# Altium PCB QV-601-Contril.PcbDoc (part 2 of 2)
Units mm, origin at the board's own origin, x right, y up, seen from the top; angles counter-clockwise.
Board outline 150.03 x 60.03 mm, 2 copper layers (TOP, BOTTOM), stack 0.264 mm thick; 44 components, 19 nets, 132 pads, 668 vias.
Unrouted connection lines stored in the file: 3.
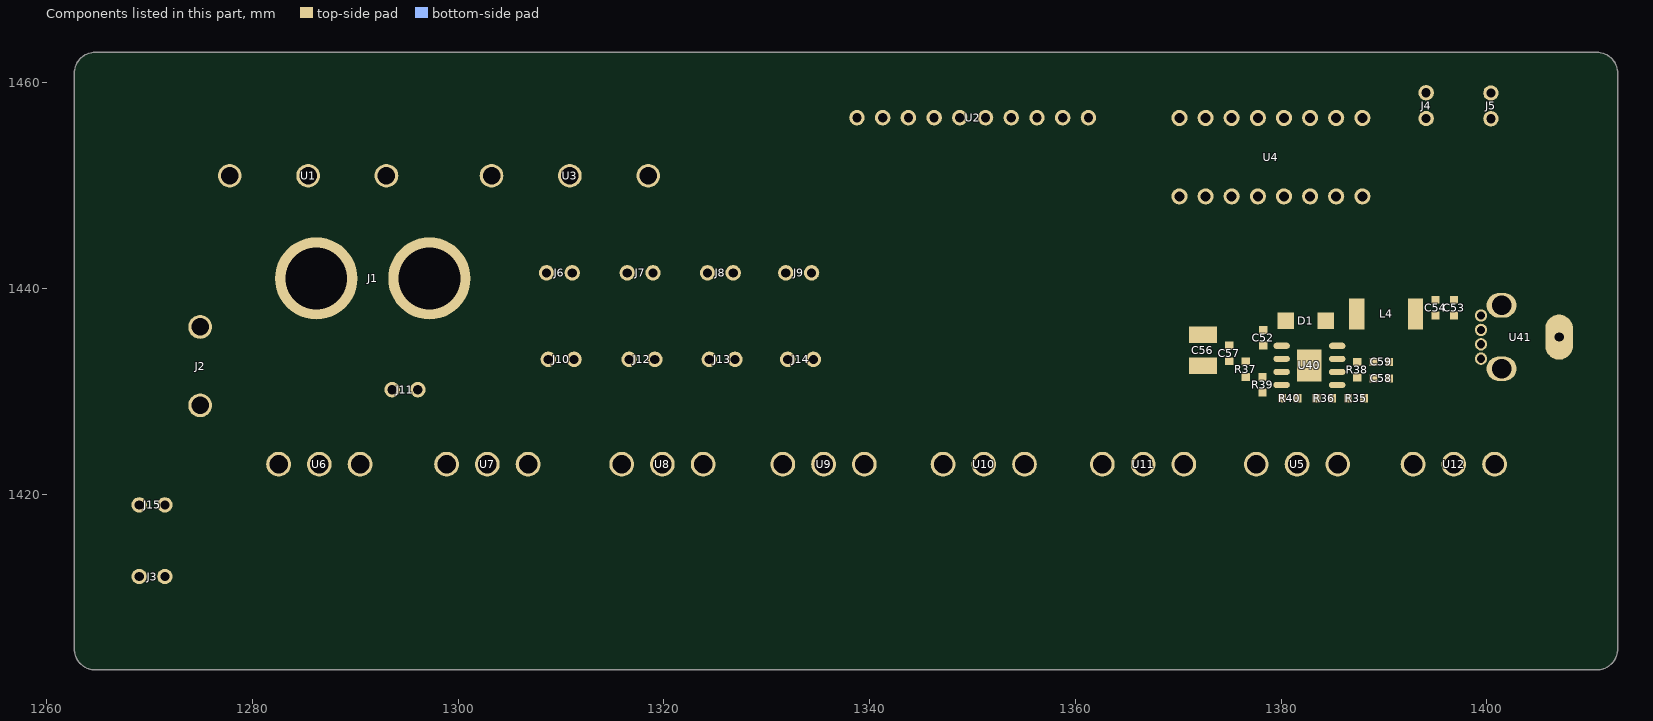
[diagram p2: the components of this part, seen from the top]

## Other copper (continued)
BOTTOM:
  pour cut-out: 1294.542,1430.17 1294.509,1430.419 1294.413,1430.651 1294.26,1430.85 1294.061,1431.003 1293.829,1431.099 1293.58,1431.132 1293.331,1431.099 1293.099,1431.003 1292.9,1430.85 1292.747,1430.651 1292.651,1430.419 1292.619,1430.17 1292.651,1429.921 1292.747,1429.689 1292.9,1429.49 1293.099,1429.337 1293.331,1429.241 1293.58,1429.209 1293.829,1429.241 1294.061,1429.337 1294.26,1429.49 1294.413,1429.689 1294.509,1429.921 1294.542,1430.17
  pour cut-out: 1335.889,1433.117 1335.842,1433.467 1335.707,1433.793 1335.492,1434.073 1335.212,1434.288 1334.886,1434.423 1334.536,1434.469 1334.186,1434.423 1333.859,1434.288 1333.579,1434.073 1333.364,1433.793 1333.229,1433.467 1333.183,1433.117 1333.229,1432.766 1333.364,1432.44 1333.579,1432.16 1333.859,1431.945 1334.186,1431.81 1334.536,1431.764 1334.886,1431.81 1335.212,1431.945 1335.492,1432.16 1335.707,1432.44 1335.842,1432.766 1335.889,1433.117
  pour cut-out: 1320.436,1433.117 1320.391,1433.458 1320.259,1433.775 1320.05,1434.048 1319.777,1434.258 1319.459,1434.389 1319.118,1434.434 1318.777,1434.389 1318.459,1434.258 1318.186,1434.048 1317.977,1433.775 1317.845,1433.458 1317.8,1433.117 1317.845,1432.776 1317.977,1432.458 1318.186,1432.185 1318.459,1431.976 1318.777,1431.844 1319.118,1431.799 1319.459,1431.844 1319.777,1431.976 1320.05,1432.185 1320.259,1432.458 1320.391,1432.776 1320.436,1433.117
  pour cut-out: 1328.217,1433.117 1328.172,1433.453 1328.042,1433.767 1327.836,1434.036 1327.566,1434.243 1327.252,1434.373 1326.916,1434.417 1326.579,1434.373 1326.265,1434.243 1325.996,1434.036 1325.789,1433.767 1325.659,1433.453 1325.615,1433.117 1325.659,1432.78 1325.789,1432.466 1325.996,1432.197 1326.265,1431.99 1326.579,1431.86 1326.916,1431.816 1327.252,1431.86 1327.566,1431.99 1327.836,1432.197 1328.042,1432.466 1328.172,1432.78 1328.217,1433.117
  pour cut-out: 1312.556,1433.117 1312.512,1433.45 1312.384,1433.76 1312.179,1434.026 1311.913,1434.231 1311.602,1434.359 1311.269,1434.403 1310.936,1434.359 1310.626,1434.231 1310.36,1434.026 1310.155,1433.76 1310.027,1433.45 1309.983,1433.117 1310.027,1432.784 1310.155,1432.473 1310.36,1432.207 1310.626,1432.002 1310.936,1431.874 1311.269,1431.83 1311.602,1431.874 1311.913,1432.002 1312.179,1432.207 1312.384,1432.473 1312.512,1432.784 1312.556,1433.117
  pour cut-out: 1291.229,1440.986 1291.186,1441.641 1291.058,1442.286 1290.847,1442.908 1290.556,1443.497 1290.191,1444.043 1289.758,1444.537 1289.264,1444.97 1288.718,1445.335 1288.129,1445.625 1287.507,1445.836 1286.863,1445.964 1286.207,1446.007 1285.552,1445.964 1284.908,1445.836 1284.286,1445.625 1283.697,1445.335 1283.151,1444.97 1282.657,1444.537 1282.224,1444.043 1281.859,1443.497 1281.568,1442.908 1281.357,1442.286 1281.229,1441.641 1281.186,1440.986 1281.229,1440.33 1281.357,1439.686 1281.568,1439.064 1281.859,1438.475 1282.224,1437.929 1282.657,1437.435 1283.151,1437.002 1283.697,1436.637 1284.286,1436.347 1284.908,1436.136 1285.552,1436.007 1286.207,1435.964 1286.863,1436.007 1287.507,1436.136 1288.129,1436.347 1288.718,1436.637 1289.264,1437.002 1289.758,1437.435 1290.191,1437.929 1290.556,1438.475 1290.847,1439.064 1291.058,1439.686 1291.186,1440.33 1291.229,1440.986
  pour cut-out: 1279.802,1450.973 1279.763,1451.365 1279.649,1451.742 1279.463,1452.089 1279.213,1452.394 1278.909,1452.644 1278.561,1452.83 1278.184,1452.944 1277.792,1452.982 1277.4,1452.944 1277.023,1452.83 1276.676,1452.644 1276.371,1452.394 1276.121,1452.089 1275.935,1451.742 1275.821,1451.365 1275.783,1450.973 1275.821,1450.581 1275.935,1450.204 1276.121,1449.856 1276.371,1449.552 1276.676,1449.302 1277.023,1449.116 1277.4,1449.002 1277.792,1448.963 1278.184,1449.002 1278.561,1449.116 1278.909,1449.302 1279.213,1449.552 1279.463,1449.856 1279.649,1450.204 1279.763,1450.581 1279.802,1450.973
  pour cut-out: 1287.422,1450.973 1287.383,1451.365 1287.269,1451.742 1287.083,1452.089 1286.833,1452.394 1286.529,1452.644 1286.181,1452.83 1285.804,1452.944 1285.412,1452.982 1285.02,1452.944 1284.643,1452.83 1284.296,1452.644 1283.991,1452.394 1283.741,1452.089 1283.555,1451.742 1283.441,1451.365 1283.403,1450.973 1283.441,1450.581 1283.555,1450.204 1283.741,1449.856 1283.991,1449.552 1284.296,1449.302 1284.643,1449.116 1285.02,1449.002 1285.412,1448.963 1285.804,1449.002 1286.181,1449.116 1286.529,1449.302 1286.833,1449.552 1287.083,1449.856 1287.269,1450.204 1287.383,1450.581 1287.422,1450.973
  pour cut-out: 1295.042,1450.973 1295.003,1451.365 1294.889,1451.742 1294.703,1452.089 1294.453,1452.394 1294.149,1452.644 1293.801,1452.83 1293.424,1452.944 1293.032,1452.982 1292.64,1452.944 1292.263,1452.83 1291.916,1452.644 1291.611,1452.394 1291.361,1452.089 1291.175,1451.742 1291.061,1451.365 1291.023,1450.973 1291.061,1450.581 1291.175,1450.204 1291.361,1449.856 1291.611,1449.552 1291.916,1449.302 1292.263,1449.116 1292.64,1449.002 1293.032,1448.963 1293.424,1449.002 1293.801,1449.116 1294.149,1449.302 1294.453,1449.552 1294.703,1449.856 1294.889,1450.204 1295.003,1450.581 1295.042,1450.973
  pour cut-out: 0,0 0.254,0 0.254,0.254 0,0.254
  pour cut-out: 0,0 0.254,0 0.254,0.254 0,0.254
  pour cut-out: 0,0 0.254,0 0.254,0.254 0,0.254
  pour cut-out: 0,0 0.254,0 0.254,0.254 0,0.254
  pour cut-out: 0,0 0.254,0 0.254,0.254 0,0.254
  pour cut-out: 0,0 0.254,0 0.254,0.254 0,0.254
  pour cut-out: 0,0 0.254,0 0.254,0.254 0,0.254
  pour cut-out: 0,0 0.254,0 0.254,0.254 0,0.254
  pour cut-out: 0,0 0.254,0 0.254,0.254 0,0.254
  pour cut-out: 0,0 0.254,0 0.254,0.254 0,0.254
  pour cut-out: 0,0 0.254,0 0.254,0.254 0,0.254
  pour cut-out: 0,0 0.254,0 0.254,0.254 0,0.254
  pour cut-out: 0,0 0.254,0 0.254,0.254 0,0.254
  pour cut-out: 0,0 0.254,0 0.254,0.254 0,0.254
  pour cut-out: 0,0 0.254,0 0.254,0.254 0,0.254
  pour cut-out: 0,0 0.254,0 0.254,0.254 0,0.254
  pour cut-out: 0,0 0.254,0 0.254,0.254 0,0.254
  pour cut-out: 0,0 0.254,0 0.254,0.254 0,0.254
  pour cut-out: 0,0 0.254,0 0.254,0.254 0,0.254
  pour cut-out: 0,0 0.254,0 0.254,0.254 0,0.254
  pour cut-out: 1295.042,1450.973 1295.003,1451.365 1294.889,1451.742 1294.703,1452.089 1294.453,1452.394 1294.149,1452.644 1293.801,1452.83 1293.424,1452.944 1293.032,1452.982 1292.64,1452.944 1292.263,1452.83 1291.916,1452.644 1291.611,1452.394 1291.361,1452.089 1291.175,1451.742 1291.061,1451.365 1291.023,1450.973 1291.061,1450.581 1291.175,1450.204 1291.361,1449.856 1291.611,1449.552 1291.916,1449.302 1292.263,1449.116 1292.64,1449.002 1293.032,1448.963 1293.424,1449.002 1293.801,1449.116 1294.149,1449.302 1294.453,1449.552 1294.703,1449.856 1294.889,1450.204 1295.003,1450.581 1295.042,1450.973
  pour cut-out: 1287.422,1450.973 1287.383,1451.365 1287.269,1451.742 1287.083,1452.089 1286.833,1452.394 1286.529,1452.644 1286.181,1452.83 1285.804,1452.944 1285.412,1452.982 1285.02,1452.944 1284.643,1452.83 1284.296,1452.644 1283.991,1452.394 1283.741,1452.089 1283.555,1451.742 1283.441,1451.365 1283.403,1450.973 1283.441,1450.581 1283.555,1450.204 1283.741,1449.856 1283.991,1449.552 1284.296,1449.302 1284.643,1449.116 1285.02,1449.002 1285.412,1448.963 1285.804,1449.002 1286.181,1449.116 1286.529,1449.302 1286.833,1449.552 1287.083,1449.856 1287.269,1450.204 1287.383,1450.581 1287.422,1450.973
  pour cut-out: 1279.802,1450.973 1279.763,1451.365 1279.649,1451.742 1279.463,1452.089 1279.213,1452.394 1278.909,1452.644 1278.561,1452.83 1278.184,1452.944 1277.792,1452.982 1277.4,1452.944 1277.023,1452.83 1276.676,1452.644 1276.371,1452.394 1276.121,1452.089 1275.935,1451.742 1275.821,1451.365 1275.783,1450.973 1275.821,1450.581 1275.935,1450.204 1276.121,1449.856 1276.371,1449.552 1276.676,1449.302 1277.023,1449.116 1277.4,1449.002 1277.792,1448.963 1278.184,1449.002 1278.561,1449.116 1278.909,1449.302 1279.213,1449.552 1279.463,1449.856 1279.649,1450.204 1279.763,1450.581 1279.802,1450.973
  pour cut-out: 1291.229,1440.986 1291.186,1441.641 1291.058,1442.286 1290.847,1442.908 1290.556,1443.497 1290.191,1444.043 1289.758,1444.537 1289.264,1444.97 1288.718,1445.335 1288.129,1445.625 1287.507,1445.836 1286.863,1445.964 1286.207,1446.007 1285.552,1445.964 1284.908,1445.836 1284.286,1445.625 1283.697,1445.335 1283.151,1444.97 1282.657,1444.537 1282.224,1444.043 1281.859,1443.497 1281.568,1442.908 1281.357,1442.286 1281.229,1441.641 1281.186,1440.986 1281.229,1440.33 1281.357,1439.686 1281.568,1439.064 1281.859,1438.475 1282.224,1437.929 1282.657,1437.435 1283.151,1437.002 1283.697,1436.637 1284.286,1436.347 1284.908,1436.136 1285.552,1436.007 1286.207,1435.964 1286.863,1436.007 1287.507,1436.136 1288.129,1436.347 1288.718,1436.637 1289.264,1437.002 1289.758,1437.435 1290.191,1437.929 1290.556,1438.475 1290.847,1439.064 1291.058,1439.686 1291.186,1440.33 1291.229,1440.986
  pour cut-out: 0,0 0.254,0 0.254,0.254 0,0.254
  pour cut-out: 0,0 0.254,0 0.254,0.254 0,0.254
  pour cut-out: 0,0 0.254,0 0.254,0.254 0,0.254
  pour cut-out: 0,0 0.254,0 0.254,0.254 0,0.254
  pour cut-out: 1312.556,1433.117 1312.512,1433.45 1312.384,1433.76 1312.179,1434.026 1311.913,1434.231 1311.602,1434.359 1311.269,1434.403 1310.936,1434.359 1310.626,1434.231 1310.36,1434.026 1310.155,1433.76 1310.027,1433.45 1309.983,1433.117 1310.027,1432.784 1310.155,1432.473 1310.36,1432.207 1310.626,1432.002 1310.936,1431.874 1311.269,1431.83 1311.602,1431.874 1311.913,1432.002 1312.179,1432.207 1312.384,1432.473 1312.512,1432.784 1312.556,1433.117
  pour cut-out: 1328.217,1433.117 1328.172,1433.453 1328.042,1433.767 1327.836,1434.036 1327.566,1434.243 1327.252,1434.373 1326.916,1434.417 1326.579,1434.373 1326.265,1434.243 1325.996,1434.036 1325.789,1433.767 1325.659,1433.453 1325.615,1433.117 1325.659,1432.78 1325.789,1432.466 1325.996,1432.197 1326.265,1431.99 1326.579,1431.86 1326.916,1431.816 1327.252,1431.86 1327.566,1431.99 1327.836,1432.197 1328.042,1432.466 1328.172,1432.78 1328.217,1433.117
  pour cut-out: 1320.436,1433.117 1320.391,1433.458 1320.259,1433.775 1320.05,1434.048 1319.777,1434.258 1319.459,1434.389 1319.118,1434.434 1318.777,1434.389 1318.459,1434.258 1318.186,1434.048 1317.977,1433.775 1317.845,1433.458 1317.8,1433.117 1317.845,1432.776 1317.977,1432.458 1318.186,1432.185 1318.459,1431.976 1318.777,1431.844 1319.118,1431.799 1319.459,1431.844 1319.777,1431.976 1320.05,1432.185 1320.259,1432.458 1320.391,1432.776 1320.436,1433.117
  pour cut-out: 1335.889,1433.117 1335.842,1433.467 1335.707,1433.793 1335.492,1434.073 1335.212,1434.288 1334.886,1434.423 1334.536,1434.469 1334.186,1434.423 1333.859,1434.288 1333.579,1434.073 1333.364,1433.793 1333.229,1433.467 1333.183,1433.117 1333.229,1432.766 1333.364,1432.44 1333.579,1432.16 1333.859,1431.945 1334.186,1431.81 1334.536,1431.764 1334.886,1431.81 1335.212,1431.945 1335.492,1432.16 1335.707,1432.44 1335.842,1432.766 1335.889,1433.117
  pour cut-out: 0,0 0.254,0 0.254,0.254 0,0.254
  pour cut-out: 0,0 0.254,0 0.254,0.254 0,0.254
  pour cut-out: 0,0 0.254,0 0.254,0.254 0,0.254
  pour cut-out: 0,0 0.254,0 0.254,0.254 0,0.254
  pour cut-out: 0,0 0.254,0 0.254,0.254 0,0.254
  pour cut-out: 0,0 0.254,0 0.254,0.254 0,0.254
  pour cut-out: 0,0 0.254,0 0.254,0.254 0,0.254
  pour cut-out: 0,0 0.254,0 0.254,0.254 0,0.254
  pour cut-out: 0,0 0.254,0 0.254,0.254 0,0.254
  pour cut-out: 0,0 0.254,0 0.254,0.254 0,0.254
  pour cut-out: 0,0 0.254,0 0.254,0.254 0,0.254
  pour cut-out: 0,0 0.254,0 0.254,0.254 0,0.254
  pour cut-out: 0,0 0.254,0 0.254,0.254 0,0.254
  pour cut-out: 0,0 0.254,0 0.254,0.254 0,0.254
  pour cut-out: 0,0 0.254,0 0.254,0.254 0,0.254
  pour cut-out: 0,0 0.254,0 0.254,0.254 0,0.254
  pour cut-out: 0,0 0.254,0 0.254,0.254 0,0.254
  pour cut-out: 0,0 0.254,0 0.254,0.254 0,0.254
  pour cut-out: 0,0 0.254,0 0.254,0.254 0,0.254
  pour cut-out: 0,0 0.254,0 0.254,0.254 0,0.254
  pour cut-out: 0,0 0.254,0 0.254,0.254 0,0.254
  pour cut-out: 0,0 0.254,0 0.254,0.254 0,0.254
  pour cut-out: 0,0 0.254,0 0.254,0.254 0,0.254
  pour cut-out: 0,0 0.254,0 0.254,0.254 0,0.254
  pour cut-out: 0,0 0.254,0 0.254,0.254 0,0.254
  pour cut-out: 0,0 0.254,0 0.254,0.254 0,0.254
  pour cut-out: 0,0 0.254,0 0.254,0.254 0,0.254
  pour cut-out: 0,0 0.254,0 0.254,0.254 0,0.254
  pour cut-out: 0,0 0.254,0 0.254,0.254 0,0.254
  pour cut-out: 0,0 0.254,0 0.254,0.254 0,0.254
  pour cut-out: 0,0 0.254,0 0.254,0.254 0,0.254
  pour cut-out: 0,0 0.254,0 0.254,0.254 0,0.254
  pour cut-out: 0,0 0.254,0 0.254,0.254 0,0.254
  pour cut-out: 0,0 0.254,0 0.254,0.254 0,0.254
  pour cut-out: 0,0 0.254,0 0.254,0.254 0,0.254
  pour cut-out: 0,0 0.254,0 0.254,0.254 0,0.254
  pour cut-out: 0,0 0.254,0 0.254,0.254 0,0.254
  pour cut-out: 0,0 0.254,0 0.254,0.254 0,0.254
  pour cut-out: 0,0 0.254,0 0.254,0.254 0,0.254
  pour cut-out: 0,0 0.254,0 0.254,0.254 0,0.254
  pour cut-out: 0,0 0.254,0 0.254,0.254 0,0.254
  pour cut-out: 0,0 0.254,0 0.254,0.254 0,0.254
  pour cut-out: 0,0 0.254,0 0.254,0.254 0,0.254
  pour cut-out: 0,0 0.254,0 0.254,0.254 0,0.254
  pour cut-out: 0,0 0.254,0 0.254,0.254 0,0.254
  pour cut-out: 0,0 0.254,0 0.254,0.254 0,0.254
  pour cut-out: 0,0 0.254,0 0.254,0.254 0,0.254
  pour cut-out: 0,0 0.254,0 0.254,0.254 0,0.254
  pour cut-out: 0,0 0.254,0 0.254,0.254 0,0.254
  pour cut-out: 0,0 0.254,0 0.254,0.254 0,0.254
  pour cut-out: 0,0 0.254,0 0.254,0.254 0,0.254
  pour cut-out: 0,0 0.254,0 0.254,0.254 0,0.254
  pour cut-out: 0,0 0.254,0 0.254,0.254 0,0.254
  pour cut-out: 0,0 0.254,0 0.254,0.254 0,0.254
  pour cut-out: 0,0 0.254,0 0.254,0.254 0,0.254
  pour cut-out: 0,0 0.254,0 0.254,0.254 0,0.254
  pour cut-out: 0,0 0.254,0 0.254,0.254 0,0.254
  pour cut-out: 0,0 0.254,0 0.254,0.254 0,0.254
  pour cut-out: 0,0 0.254,0 0.254,0.254 0,0.254
  pour cut-out: 0,0 0.254,0 0.254,0.254 0,0.254
  pour cut-out: 0,0 0.254,0 0.254,0.254 0,0.254
  pour cut-out: 0,0 0.254,0 0.254,0.254 0,0.254
  pour cut-out: 0,0 0.254,0 0.254,0.254 0,0.254
  pour cut-out: 0,0 0.254,0 0.254,0.254 0,0.254
  pour cut-out: 0,0 0.254,0 0.254,0.254 0,0.254
  pour cut-out: 0,0 0.254,0 0.254,0.254 0,0.254
  pour cut-out: 0,0 0.254,0 0.254,0.254 0,0.254
  pour cut-out: 0,0 0.254,0 0.254,0.254 0,0.254
  pour cut-out: 0,0 0.254,0 0.254,0.254 0,0.254
  pour cut-out: 0,0 0.254,0 0.254,0.254 0,0.254
  pour cut-out: 0,0 0.254,0 0.254,0.254 0,0.254
  pour cut-out: 0,0 0.254,0 0.254,0.254 0,0.254
  pour cut-out: 0,0 0.254,0 0.254,0.254 0,0.254
  pour cut-out: 0,0 0.254,0 0.254,0.254 0,0.254
  pour cut-out: 0,0 0.254,0 0.254,0.254 0,0.254
  pour cut-out: 0,0 0.254,0 0.254,0.254 0,0.254
  pour cut-out: 0,0 0.254,0 0.254,0.254 0,0.254
  pour cut-out: 0,0 0.254,0 0.254,0.254 0,0.254
  pour cut-out: 0,0 0.254,0 0.254,0.254 0,0.254
  pour cut-out: 0,0 0.254,0 0.254,0.254 0,0.254
  pour cut-out: 0,0 0.254,0 0.254,0.254 0,0.254
  pour cut-out: 0,0 0.254,0 0.254,0.254 0,0.254
  pour cut-out: 0,0 0.254,0 0.254,0.254 0,0.254
  pour cut-out: 0,0 0.254,0 0.254,0.254 0,0.254
  pour cut-out: 0,0 0.254,0 0.254,0.254 0,0.254
  pour cut-out: 0,0 0.254,0 0.254,0.254 0,0.254
  pour cut-out: 0,0 0.254,0 0.254,0.254 0,0.254
  pour cut-out: 0,0 0.254,0 0.254,0.254 0,0.254
  pour cut-out: 0,0 0.254,0 0.254,0.254 0,0.254
  pour cut-out: 0,0 0.254,0 0.254,0.254 0,0.254
  pour cut-out: 0,0 0.254,0 0.254,0.254 0,0.254
  pour cut-out: 0,0 0.254,0 0.254,0.254 0,0.254
  pour cut-out: 0,0 0.254,0 0.254,0.254 0,0.254
  pour cut-out: 0,0 0.254,0 0.254,0.254 0,0.254
  pour cut-out: 0,0 0.254,0 0.254,0.254 0,0.254
  pour cut-out: 0,0 0.254,0 0.254,0.254 0,0.254
  pour cut-out: 0,0 0.254,0 0.254,0.254 0,0.254
  pour cut-out: 0,0 0.254,0 0.254,0.254 0,0.254
  pour cut-out: 0,0 0.254,0 0.254,0.254 0,0.254
  pour cut-out: 0,0 0.254,0 0.254,0.254 0,0.254
  pour cut-out: 0,0 0.254,0 0.254,0.254 0,0.254
  pour cut-out: 0,0 0.254,0 0.254,0.254 0,0.254
  pour cut-out: 0,0 0.254,0 0.254,0.254 0,0.254
  pour cut-out: 0,0 0.254,0 0.254,0.254 0,0.254
  pour cut-out: 0,0 0.254,0 0.254,0.254 0,0.254
  pour cut-out: 0,0 0.254,0 0.254,0.254 0,0.254
  pour cut-out: 0,0 0.254,0 0.254,0.254 0,0.254
  pour cut-out: 0,0 0.254,0 0.254,0.254 0,0.254
  pour cut-out: 0,0 0.254,0 0.254,0.254 0,0.254
  pour cut-out: 0,0 0.254,0 0.254,0.254 0,0.254
  pour cut-out: 0,0 0.254,0 0.254,0.254 0,0.254
  pour cut-out: 0,0 0.254,0 0.254,0.254 0,0.254
  pour cut-out: 0,0 0.254,0 0.254,0.254 0,0.254
  pour cut-out: 0,0 0.254,0 0.254,0.254 0,0.254
  pour cut-out: 0,0 0.254,0 0.254,0.254 0,0.254
  pour cut-out: 0,0 0.254,0 0.254,0.254 0,0.254
  pour cut-out: 0,0 0.254,0 0.254,0.254 0,0.254
  pour cut-out: 0,0 0.254,0 0.254,0.254 0,0.254
  pour cut-out: 0,0 0.254,0 0.254,0.254 0,0.254
  pour cut-out: 0,0 0.254,0 0.254,0.254 0,0.254
  pour cut-out: 0,0 0.254,0 0.254,0.254 0,0.254
  pour cut-out: 0,0 0.254,0 0.254,0.254 0,0.254
  pour cut-out: 0,0 0.254,0 0.254,0.254 0,0.254
  pour cut-out: 0,0 0.254,0 0.254,0.254 0,0.254
  pour cut-out: 0,0 0.254,0 0.254,0.254 0,0.254
  pour cut-out: 0,0 0.254,0 0.254,0.254 0,0.254
  pour cut-out: 0,0 0.254,0 0.254,0.254 0,0.254
  pour cut-out: 0,0 0.254,0 0.254,0.254 0,0.254
  pour cut-out: 0,0 0.254,0 0.254,0.254 0,0.254
  pour cut-out: 0,0 0.254,0 0.254,0.254 0,0.254
  pour cut-out: 0,0 0.254,0 0.254,0.254 0,0.254
  pour cut-out: 0,0 0.254,0 0.254,0.254 0,0.254
  pour cut-out: 0,0 0.254,0 0.254,0.254 0,0.254
  pour cut-out: 0,0 0.254,0 0.254,0.254 0,0.254
  pour cut-out: 0,0 0.254,0 0.254,0.254 0,0.254
  pour cut-out: 0,0 0.254,0 0.254,0.254 0,0.254
  pour cut-out: 0,0 0.254,0 0.254,0.254 0,0.254
  pour cut-out: 0,0 0.254,0 0.254,0.254 0,0.254
  pour cut-out: 0,0 0.254,0 0.254,0.254 0,0.254
  pour cut-out: 0,0 0.254,0 0.254,0.254 0,0.254
  pour cut-out: 0,0 0.254,0 0.254,0.254 0,0.254
  pour cut-out: 0,0 0.254,0 0.254,0.254 0,0.254
  pour cut-out: 0,0 0.254,0 0.254,0.254 0,0.254
  pour cut-out: 0,0 0.254,0 0.254,0.254 0,0.254
  pour cut-out: 0,0 0.254,0 0.254,0.254 0,0.254
  pour cut-out: 0,0 0.254,0 0.254,0.254 0,0.254
  pour cut-out: 0,0 0.254,0 0.254,0.254 0,0.254
  pour cut-out: 0,0 0.254,0 0.254,0.254 0,0.254
  pour cut-out: 0,0 0.254,0 0.254,0.254 0,0.254
  pour cut-out: 0,0 0.254,0 0.254,0.254 0,0.254
  pour cut-out: 0,0 0.254,0 0.254,0.254 0,0.254
  pour cut-out: 0,0 0.254,0 0.254,0.254 0,0.254
  pour cut-out: 0,0 0.254,0 0.254,0.254 0,0.254
  pour cut-out: 0,0 0.254,0 0.254,0.254 0,0.254
  pour cut-out: 0,0 0.254,0 0.254,0.254 0,0.254
  pour cut-out: 0,0 0.254,0 0.254,0.254 0,0.254
  pour cut-out: 0,0 0.254,0 0.254,0.254 0,0.254
  pour cut-out: 0,0 0.254,0 0.254,0.254 0,0.254
  pour cut-out: 0,0 0.254,0 0.254,0.254 0,0.254
  pour cut-out: 0,0 0.254,0 0.254,0.254 0,0.254
  pour cut-out: 0,0 0.254,0 0.254,0.254 0,0.254
  pour cut-out: 0,0 0.254,0 0.254,0.254 0,0.254
  pour cut-out: 0,0 0.254,0 0.254,0.254 0,0.254

## Silkscreen, mask and mechanical layers (free items; w line width, h text height)
Top Overlay:
  text "7" at 1381.912,1461.331 h1.27 r270
  text "1" at 1384.655,1461.331 h1.27 r270
  text "6" at 1387.317,1461.336 h1.27 r270
  text "4" at 1379.525,1461.254 h1.27 r270
  text "5" at 1377.086,1461.153 h1.27 r270
  text "2" at 1371.828,1461.102 h1.27 r270
  text "3" at 1374.495,1461.102 h1.27 r270
  text "8" at 1369.466,1461.077 h1.27 r270
  text "QV-601-Control" at 1345.534,1459.99 h1.27
  text "8" at 1344.264,1453.843 h1.27 r270
  text "V-" at 1342.003,1453.818 h1.27 r270
  text "2" at 1346.829,1453.767 h1.27 r270
  text "3" at 1349.369,1453.767 h1.27 r270
  text "5" at 1351.859,1453.64 h1.27 r270
  text "4" at 1354.399,1453.538 h1.27 r270
  text "7" at 1356.939,1453.538 h1.27 r270
  text "1" at 1359.656,1453.487 h1.27 r270
  text "6" at 1361.892,1453.487 h1.27 r270
  text "V+" at 1364.482,1453.462 h1.27 r270
  text "FAN1" at 1399.382,1452.471 h1.27
  text "FAN2" at 1391.737,1452.344 h1.27
  text "GND" at 1323.487,1448.204 h1.27
  text "7" at 1382.005,1446.727 h1.27 r270
  text "1" at 1384.748,1446.727 h1.27 r270
  text "6" at 1387.41,1446.733 h1.27 r270
  text "4" at 1379.618,1446.651 h1.27 r270
  text "5" at 1377.179,1446.549 h1.27 r270
  text "2" at 1371.921,1446.498 h1.27 r270
  text "3" at 1374.588,1446.498 h1.27 r270
  text "8" at 1369.559,1446.473 h1.27 r270
  text "Chaarger" at 1266.616,1446.071 h1.27
  text "3" at 1324.782,1444.826 h1.27
  text "8" at 1309.136,1444.699 h1.27
  text "2" at 1317.213,1444.623 h1.27
  text "5" at 1332.402,1444.623 h1.27
  text "IN BAT" at 1272.128,1439.517 h1.27
  text "1" at 1325.443,1436.495 h1.27
  text "6" at 1332.682,1436.393 h1.27
  text "4" at 1309.466,1436.342 h1.27
  text "7" at 1317.518,1436.317 h1.27
  text "EXT BAT" at 1279.672,1434.514 h1.27 r270
  text "POWER" at 1291.661,1426.386 h1.27
  text "FAN4" at 1264.127,1420.34 h1.27 r270
  text "2" at 1302.938,1416.734 h1.27
  text "3" at 1319.651,1416.657 h1.27
  text "6" at 1396.867,1416.632 h1.27
  text "5" at 1335.653,1416.581 h1.27
  text "4" at 1350.919,1416.556 h1.27
  text "7" at 1366.057,1416.454 h1.27
  text "1" at 1381.119,1416.378 h1.27
  text "8" at 1285.438,1416.251 h1.27
  text "FAN3" at 1264.279,1414.143 h1.27 r270
NCLEGEND-1-2:
  circle w0.025: c1430.484,1383.856 r3
  circle w0.025: c1430.484,1428.856 r0.4
  circle w0.025: c1430.484,1446.856 r0.013
  lines w0.025: 1419.067,1370.356 1541.901,1370.356 ; 1419.067,1379.356 1541.901,1379.356 ; 1419.067,1388.356 1541.901,1388.356 ; 1419.067,1397.356 1541.901,1397.356 ; 1419.067,1406.356 1541.901,1406.356 ; 1419.067,1415.356 1541.901,1415.356 ; 1419.067,1424.356 1541.901,1424.356 ; 1419.067,1433.356 1541.901,1433.356 ; 1419.067,1442.356 1541.901,1442.356 ; 1419.067,1451.356 1541.901,1451.356 ; 1419.067,1457.706 1541.901,1457.706 ; 1419.067,1464.056 1541.901,1464.056 ; 1429.584,1392.856 1431.384,1392.856 ; 1429.634,1401.856 1431.334,1401.856 ; 1429.999,1410.856 1430.969,1410.856 ; 1430.034,1419.856 1430.934,1419.856 ; 1430.484,1391.956 1430.484,1393.756 ; 1430.484,1401.006 1430.484,1402.706 ; 1430.484,1410.371 1430.484,1411.341 ; 1430.484,1419.406 1430.484,1420.306 ; 1441.902,1361.356 1441.902,1457.706 ; 1489.933,1361.356 1489.933,1457.706 ; 1522.216,1361.356 1522.216,1457.706 ; 1419.067,1361.356 1541.901,1361.356 1541.901,1470.556 1419.067,1470.556 1419.067,1361.356 ; 1429.634,1364.956 ccw(c1429.634,1365.856) 1429.634,1366.756 1431.334,1366.756 ccw(c1431.334,1365.856) 1431.334,1364.956 1429.634,1364.956 ; 1430.23,1437.602 1430.23,1438.11 1430.738,1438.11 1430.738,1437.602 1430.23,1437.602 ; 1430.234,1373.456 ccw(c1430.234,1374.856) 1430.234,1376.256 1430.734,1376.256 ccw(c1430.734,1374.856) 1430.734,1373.456 1430.234,1373.456
  text "DRILL CHART: TOP to BOTTOM" at 1447.464,1465.794 h3.17
  text "ALL UNITS ARE IN MILLIMETERS" at 1444.924,1459.294 h3.17
  text "FIGURE" at 1422.864,1452.944 h3.17
  text "SIZE" at 1460.837,1452.944 h3.17
  text "PLATED" at 1498.455,1452.944 h3.17
  text "QTY" at 1528.249,1452.944 h3.17
  text "0.254" at 1459.567,1445.269 h3.17
  text "PLATED" at 1498.455,1445.269 h3.17
  text "7" at 1530.789,1445.269 h3.17
  text "0.508" at 1459.567,1436.269 h3.17
  text "PLATED" at 1498.455,1436.269 h3.17
  text "661" at 1528.249,1436.269 h3.17
  text "0.8" at 1462.107,1427.269 h3.17
  text "PLATED" at 1498.455,1427.269 h3.17
  text "4" at 1530.789,1427.269 h3.17
  text "0.9" at 1462.107,1418.269 h3.17
  text "PLATED" at 1498.455,1418.269 h3.17
  text "36" at 1529.519,1418.269 h3.17
  text "0.97" at 1460.837,1409.269 h3.17
  text "PLATED" at 1498.455,1409.269 h3.17
  text "16" at 1529.519,1409.269 h3.17
  text "1.7" at 1462.107,1400.269 h3.17
  text "PLATED" at 1498.455,1400.269 h3.17
  text "8" at 1530.789,1400.269 h3.17
  text "1.8" at 1462.107,1391.269 h3.17
  text "PLATED" at 1498.455,1391.269 h3.17
  text "24" at 1529.519,1391.269 h3.17
  text "6.0" at 1462.107,1382.269 h3.17
  text "PLATED" at 1498.455,1382.269 h3.17
  text "2" at 1530.789,1382.269 h3.17
  text "1.9x1.4" at 1457.027,1373.269 h3.17
  text "PLATED" at 1498.455,1373.269 h3.17
  text "2" at 1530.789,1373.269 h3.17
  text "2.6x0.9" at 1457.027,1364.269 h3.17
  text "PLATED" at 1498.455,1364.269 h3.17
  text "1" at 1530.789,1364.269 h3.17
DXF_321B:
  circle w0.025: c1364.379,1419.965 r0.85
  circle w0.025: c1364.379,1413.965 r0.85
  circle w0.025: c1339.179,1413.965 r0.85
  circle w0.025: c1339.179,1422.965 r0.85
  circle w0.025: c1368.929,1414.352 r1.1
  circle w0.025: c1299.929,1414.352 r1.1
  lines w0.025: 1302.429,1411.052 1302.429,1425.052 ; 1314.879,1425.052 1314.879,1419.052 1319.879,1419.052 1319.879,1425.052 ; 1331.429,1411.052 1331.429,1425.052 ; 1336.429,1411.052 1336.429,1425.052 ; 1349.279,1411.052 1349.279,1425.052 ; 1354.279,1411.052 1354.279,1425.052 ; 1366.429,1411.052 1366.429,1425.052 ; 1294.429,1412.052 ccw(c1295.429,1412.052) 1295.429,1411.052 1373.429,1411.052 ccw(c1373.429,1412.052) 1374.429,1412.052 1374.429,1424.052 ccw(c1373.429,1424.052) 1373.429,1425.052 1295.429,1425.052 ccw(c1295.429,1424.052) 1294.429,1424.052 1294.429,1412.052 ; 1310.329,1413.102 1324.129,1413.102 1324.129,1414.202 1323.579,1414.202 1323.579,1415.702 1323.464,1415.702 1323.464,1415.302 1322.994,1415.302 1322.994,1415.702 1322.864,1415.702 1322.864,1415.302 1322.394,1415.302 1322.394,1415.702 1322.264,1415.702 1322.264,1415.302 1321.794,1415.302 1321.794,1415.702 1321.664,1415.702 1321.664,1415.302 1321.194,1415.302 1321.194,1415.702 1321.064,1415.702 1321.064,1415.302 1320.594,1415.302 1320.594,1415.702 1320.464,1415.702 1320.464,1415.302 1319.994,1415.302 1319.994,1415.702 1319.864,1415.702 1319.864,1415.302 1319.394,1415.302 1319.394,1415.702 1319.264,1415.702 1319.264,1415.302 1318.794,1415.302 1318.794,1415.702 1318.664,1415.702 1318.664,1415.302 1318.194,1415.302 1318.194,1415.702 1318.064,1415.702 1318.064,1415.302 1317.939,1415.302 1317.939,1414.816 1317.819,1414.816 1317.819,1415.302 1317.594,1415.302 1317.594,1415.702 1317.464,1415.702 1317.464,1415.302 1316.994,1415.302 1316.994,1415.702 1316.864,1415.702 1316.864,1415.302 1316.639,1415.302 1316.639,1414.816 1316.519,1414.816 1316.519,1415.302 1316.394,1415.302 1316.394,1415.702 1316.264,1415.702 1316.264,1415.302 1315.794,1415.302 1315.794,1415.702 1315.664,1415.702 1315.664,1415.302 1315.194,1415.302 1315.194,1415.702 1315.064,1415.702 1315.064,1415.302 1314.594,1415.302 1314.594,1415.702 1314.464,1415.702 1314.464,1415.302 1313.994,1415.302 1313.994,1415.702 1313.864,1415.702 1313.864,1415.302 1313.394,1415.302 1313.394,1415.702 1313.264,1415.702 1313.264,1415.302 1312.794,1415.302 1312.794,1415.702 1312.664,1415.702 1312.664,1415.302 1312.194,1415.302 1312.194,1415.702 1312.064,1415.702 1312.064,1415.302 1311.594,1415.302 1311.594,1415.702 1311.464,1415.702 1311.464,1415.302 1310.994,1415.302 1310.994,1415.702 1310.879,1415.702 1310.879,1414.202 1310.329,1414.202 1310.329,1413.102
DXF_321_TOP:
  drawing of 260 lines, arcs and shapes, not listed
TOP_NEW:
  circle w0.025: c1339.179,1413.961 r0.85
  circle w0.025: c1364.379,1413.961 r0.85
  circle w0.025: c1364.379,1419.961 r0.85
  circle w0.025: c1339.179,1422.961 r0.85
  circle w0.025: c1299.929,1414.348 r1.1
  circle w0.025: c1368.929,1414.348 r1.1
  circle w0.025: c1326.879,1416.748 r2.05
  circle w0.025: c1307.879,1416.748 r2.05
  circle w0.025: c1339.179,1413.961 r0.85
  circle w0.025: c1364.379,1413.961 r0.85
  circle w0.025: c1364.379,1419.961 r0.85
  circle w0.025: c1339.179,1422.961 r0.85
  circle w0.025: c1299.929,1414.348 r1.1
  circle w0.025: c1368.929,1414.348 r1.1
  circle w0.025: c1326.879,1416.748 r2.05
  circle w0.025: c1307.879,1416.748 r2.05
  lines w0.025: 1294.429,1412.048 ccw(c1295.429,1412.048) 1295.429,1411.048 ; 1294.429,1412.048 ccw(c1295.429,1412.048) 1295.429,1411.048 ; 1294.429,1412.048 1294.429,1424.048 ; 1294.429,1412.048 1294.429,1424.048 ; 1294.429,1424.048 cw(c1295.429,1424.048) 1295.429,1425.048 ; 1294.429,1424.048 cw(c1295.429,1424.048) 1295.429,1425.048 ; 1295.429,1411.048 1373.429,1411.048 ; 1295.429,1411.048 1373.429,1411.048 ; 1295.429,1425.048 1373.429,1425.048 ; 1295.429,1425.048 1373.429,1425.048 ; 1337.179,1412.961 1337.179,1423.961 ; 1337.179,1412.961 1366.379,1412.961 ; 1337.179,1412.961 1337.179,1423.961 ; 1337.179,1412.961 1366.379,1412.961 ; 1337.179,1423.961 1344.179,1423.961 ; 1337.179,1423.961 1344.179,1423.961 ; 1342.379,1414.161 1342.379,1419.761 ; 1342.379,1414.161 1347.129,1414.161 ; 1342.379,1414.161 1342.379,1419.761 ; 1342.379,1414.161 1347.129,1414.161 ; 1342.379,1419.761 1347.129,1419.761 ; 1342.379,1419.761 1347.129,1419.761 ; 1342.929,1414.713 1342.929,1419.21 ; 1342.929,1414.713 1344.629,1414.713 ; 1342.929,1414.713 1342.929,1419.21 ; 1342.929,1414.713 1344.629,1414.713 ; 1342.929,1419.21 1344.629,1419.21 ; 1342.929,1419.21 1344.629,1419.21 ; 1344.179,1420.961 1344.179,1423.961 ; 1344.179,1420.961 1366.379,1420.961 ; 1344.179,1420.961 1344.179,1423.961 ; 1344.179,1420.961 1366.379,1420.961 ; 1344.629,1414.713 1344.629,1419.21 ; 1344.629,1414.713 1344.629,1419.21 ; 1347.129,1414.161 1347.129,1419.761 ; 1347.129,1414.161 1347.129,1419.761 ; 1348.429,1414.161 1348.429,1419.761 ; 1348.429,1414.161 1355.129,1414.161 ; 1348.429,1414.161 1348.429,1419.761 ; 1348.429,1414.161 1355.129,1414.161 ; 1348.429,1419.761 1355.129,1419.761 ; 1348.429,1419.761 1355.129,1419.761 ; 1350.929,1414.713 1350.929,1419.21 ; 1350.929,1414.713 1352.629,1414.713 ; 1350.929,1414.713 1350.929,1419.21 ; 1350.929,1414.713 1352.629,1414.713 ; 1350.929,1419.21 1352.629,1419.21 ; 1350.929,1419.21 1352.629,1419.21 ; 1352.629,1414.713 1352.629,1419.21 ; 1352.629,1414.713 1352.629,1419.21 ; 1355.129,1414.161 1355.129,1419.761 ; 1355.129,1414.161 1355.129,1419.761 ; 1356.429,1414.161 1356.429,1419.761 ; 1356.429,1414.161 1361.179,1414.161 ; 1356.429,1414.161 1356.429,1419.761 ; 1356.429,1414.161 1361.179,1414.161 ; 1356.429,1419.761 1361.179,1419.761 ; 1356.429,1419.761 1361.179,1419.761 ; 1358.929,1414.713 1358.929,1419.21 ; 1358.929,1414.713 1360.629,1414.713 ; 1358.929,1414.713 1358.929,1419.21 ; 1358.929,1414.713 1360.629,1414.713 ; 1358.929,1419.21 1360.629,1419.21 ; 1358.929,1419.21 1360.629,1419.21 ; 1360.629,1414.713 1360.629,1419.21 ; 1360.629,1414.713 1360.629,1419.21 ; 1361.179,1414.161 1361.179,1419.761 ; 1361.179,1414.161 1361.179,1419.761 ; 1366.379,1412.961 1366.379,1420.961 ; 1366.379,1412.961 1366.379,1420.961 ; 1373.429,1411.048 ccw(c1373.429,1412.048) 1374.429,1412.048 ; 1373.429,1411.048 ccw(c1373.429,1412.048) 1374.429,1412.048 ; 1373.429,1425.048 cw(c1373.429,1424.048) 1374.429,1424.048 ; 1373.429,1425.048 cw(c1373.429,1424.048) 1374.429,1424.048 ; 1374.429,1412.048 1374.429,1424.048 ; 1374.429,1412.048 1374.429,1424.048 ; 1297.429,1411.048 1297.429,1425.048 1297.429,1411.048 ; 1331.429,1411.048 1331.429,1425.048 1331.429,1411.048 ; 1336.429,1411.048 1336.429,1425.048 1336.429,1411.048 ; 1363.529,1419.961 ccw(c1364.379,1419.961) 1363.747,1419.392 cw(c1364.379,1419.961) 1363.529,1419.961 ; 1367.829,1414.348 ccw(c1368.929,1414.348) 1367.953,1413.84 cw(c1368.929,1414.348) 1367.829,1414.348 ; 1371.429,1411.048 1371.429,1425.048 1371.429,1411.048
TOPNEW:
  drawing of 175 lines, arcs and shapes, not listed
DXF_320:
  drawing of 201 lines, arcs and shapes, not listed
DRAWING_ORIGIN:
  lines w0.025: 1283.764,1341.524 1284.164,1341.524 ; 1283.964,1341.324 1283.964,1341.724

## Text inside footprints (layer, text, board x,y; h text height)
C52: PIN_NUMBER "1" at 1378.035,1434.463 h0.6 r90; PIN_NUMBER "2" at 1378.035,1435.987 h0.6 r90
C53: PIN_NUMBER "1" at 1396.577,1437.384 h0.6 r90; PIN_NUMBER "2" at 1396.577,1438.908 h0.6 r90
C54: PIN_NUMBER "1" at 1394.773,1437.384 h0.6 r90; PIN_NUMBER "2" at 1394.773,1438.908 h0.6 r90
C56: PIN_NUMBER "1" at 1372.153,1432.482 h0.64 r90; PIN_NUMBER "2" at 1372.153,1435.514 h0.64 r90
C57: PIN_NUMBER "1" at 1374.733,1432.939 h0.6 r90; PIN_NUMBER "2" at 1374.733,1434.463 h0.6 r90
C58: PIN_NUMBER "2" at 1388.754,1431.262 h0.6 r180; PIN_NUMBER "1" at 1390.278,1431.262 h0.6 r180
C59: PIN_NUMBER "2" at 1388.754,1432.863 h0.6 r180; PIN_NUMBER "1" at 1390.278,1432.863 h0.6 r180
D1: PIN_NUMBER "2" at 1380.19,1436.876 h0.64 r180; PIN_NUMBER "1" at 1384.091,1436.876 h0.64 r180
J1: PIN_NUMBER "1" at 1284.429,1440.986 h0.64; PIN_NUMBER "2" at 1295.429,1440.986 h0.64
J2: PIN_NUMBER "1" at 1274.668,1436.266 h0.64 r270; PIN_NUMBER "2" at 1274.668,1428.646 h0.64 r270
J3: PIN_NUMBER "1" at 1271.239,1412.009 h0.64 r180; PIN_NUMBER "2" at 1268.739,1412.009 h0.64 r180
J4: PIN_NUMBER "1" at 1393.845,1456.535 h0.64 r90; PIN_NUMBER "2" at 1393.845,1459.035 h0.64 r90
J5: PIN_NUMBER "1" at 1400.144,1456.51 h0.64 r90; PIN_NUMBER "2" at 1400.144,1459.01 h0.64 r90
J6: PIN_NUMBER "2" at 1310.838,1441.524 h0.64; PIN_NUMBER "1" at 1308.338,1441.524 h0.64
J7: PIN_NUMBER "2" at 1318.686,1441.524 h0.64; PIN_NUMBER "1" at 1316.186,1441.524 h0.64
J8: PIN_NUMBER "2" at 1326.484,1441.524 h0.64; PIN_NUMBER "1" at 1323.984,1441.524 h0.64
J9: PIN_NUMBER "2" at 1334.104,1441.524 h0.64; PIN_NUMBER "1" at 1331.604,1441.524 h0.64
J10: PIN_NUMBER "2" at 1311.015,1433.117 h0.64; PIN_NUMBER "1" at 1308.515,1433.117 h0.64
J11: PIN_NUMBER "2" at 1293.326,1430.17 h0.64 r180; PIN_NUMBER "1" at 1295.826,1430.17 h0.64 r180
J12: PIN_NUMBER "2" at 1318.864,1433.117 h0.64; PIN_NUMBER "1" at 1316.364,1433.117 h0.64
J13: PIN_NUMBER "2" at 1326.662,1433.117 h0.64; PIN_NUMBER "1" at 1324.162,1433.117 h0.64
J14: PIN_NUMBER "2" at 1334.282,1433.117 h0.64; PIN_NUMBER "1" at 1331.782,1433.117 h0.64
J15: PIN_NUMBER "1" at 1271.239,1418.969 h0.64 r180; PIN_NUMBER "2" at 1268.739,1418.969 h0.64 r180
L4: PIN_NUMBER "2" at 1392.814,1437.536 h0.64 r90; PIN_NUMBER "1" at 1387.114,1437.536 h0.64 r90
R35: PIN_NUMBER "2" at 1387.814,1429.332 h0.6; PIN_NUMBER "1" at 1386.29,1429.332 h0.6
R36: PIN_NUMBER "2" at 1384.715,1429.332 h0.6; PIN_NUMBER "1" at 1383.191,1429.332 h0.6
R37: PIN_NUMBER "1" at 1376.333,1431.415 h0.6 r90; PIN_NUMBER "2" at 1376.333,1432.939 h0.6 r90
R38: PIN_NUMBER "2" at 1387.179,1431.339 h0.6 r270; PIN_NUMBER "1" at 1387.179,1432.863 h0.6 r270
R39: PIN_NUMBER "2" at 1377.958,1431.415 h0.6 r90; PIN_NUMBER "1" at 1377.958,1429.891 h0.6 r90
R40: PIN_NUMBER "2" at 1379.838,1429.332 h0.6 r180; PIN_NUMBER "1" at 1381.362,1429.332 h0.6 r180
U1: PIN_NUMBER "1" at 1292.778,1450.973 h0.64 r180; PIN_NUMBER "2" at 1285.158,1450.973 h0.64 r180; PIN_NUMBER "3" at 1277.538,1450.973 h0.64 r180
U2: PIN_NUMBER "9" at 1342.032,1456.612 h0.64 r180; PIN_NUMBER "8" at 1344.532,1456.612 h0.64 r180; PIN_NUMBER "7" at 1347.032,1456.612 h0.64 r180; PIN_NUMBER "6" at 1349.532,1456.612 h0.64 r180; PIN_NUMBER "5" at 1352.032,1456.612 h0.64 r180; PIN_NUMBER "4" at 1354.532,1456.612 h0.64 r180; PIN_NUMBER "3" at 1357.032,1456.612 h0.64 r180; PIN_NUMBER "2" at 1359.532,1456.612 h0.64 r180; PIN_NUMBER "1" at 1362.032,1456.612 h0.64 r180; PIN_NUMBER "10" at 1339.024,1456.612 h0.64 r180
U3: PIN_NUMBER "1" at 1318.229,1450.973 h0.64 r180; PIN_NUMBER "2" at 1310.609,1450.973 h0.64 r180; PIN_NUMBER "3" at 1302.989,1450.973 h0.64 r180
U4: PIN_NUMBER "9" at 1369.867,1448.966 h0.64 r180; PIN_NUMBER "10" at 1372.153,1448.966 h0.64 r180; PIN_NUMBER "11" at 1374.693,1448.966 h0.64 r180; PIN_NUMBER "12" at 1377.233,1448.966 h0.64 r180; PIN_NUMBER "13" at 1379.773,1448.966 h0.64 r180; PIN_NUMBER "14" at 1382.313,1448.966 h0.64 r180; PIN_NUMBER "15" at 1384.853,1448.966 h0.64 r180; PIN_NUMBER "16" at 1387.393,1448.966 h0.64 r180; PIN_NUMBER "1" at 1387.647,1456.586 h0.64 r180; PIN_NUMBER "2" at 1385.107,1456.586 h0.64 r180; PIN_NUMBER "3" at 1382.567,1456.586 h0.64 r180; PIN_NUMBER "4" at 1380.027,1456.586 h0.64 r180; PIN_NUMBER "5" at 1377.487,1456.586 h0.64 r180; PIN_NUMBER "6" at 1374.947,1456.586 h0.64 r180; PIN_NUMBER "8" at 1369.867,1456.586 h0.64 r180; PIN_NUMBER "7" at 1372.407,1456.586 h0.64 r180; Top Overlay "ON" at 1389.247,1451.481 h1.6 r180; Top Overlay "1" at 1388.485,1455.469 h1.6 r180; Top Overlay "2" at 1386.047,1455.443 h1.6 r180; Top Overlay "3" at 1383.405,1455.443 h1.6 r180; Top Overlay "4" at 1380.84,1455.469 h1.6 r180; Top Overlay "5" at 1378.325,1455.57 h1.6 r180; Top Overlay "6" at 1375.76,1455.621 h1.6 r180; Top Overlay "7" at 1373.22,1455.672 h1.6 r180; Top Overlay "8" at 1370.68,1455.672 h1.6 r180
U5: PIN_NUMBER "3" at 1385.257,1422.931 h0.64; PIN_NUMBER "1" at 1377.337,1422.931 h0.64; PIN_NUMBER "2" at 1381.297,1422.931 h0.64
U6: PIN_NUMBER "3" at 1290.21,1422.931 h0.64; PIN_NUMBER "1" at 1282.29,1422.931 h0.64; PIN_NUMBER "2" at 1286.25,1422.931 h0.64
U7: PIN_NUMBER "3" at 1306.543,1422.931 h0.64; PIN_NUMBER "1" at 1298.623,1422.931 h0.64; PIN_NUMBER "2" at 1302.583,1422.931 h0.64
U8: PIN_NUMBER "3" at 1323.561,1422.931 h0.64; PIN_NUMBER "1" at 1315.641,1422.931 h0.64; PIN_NUMBER "2" at 1319.601,1422.931 h0.64
U9: PIN_NUMBER "3" at 1339.232,1422.931 h0.64; PIN_NUMBER "1" at 1331.312,1422.931 h0.64; PIN_NUMBER "2" at 1335.272,1422.931 h0.64
U10: PIN_NUMBER "3" at 1354.803,1422.931 h0.64; PIN_NUMBER "1" at 1346.883,1422.931 h0.64; PIN_NUMBER "2" at 1350.843,1422.931 h0.64
U11: PIN_NUMBER "3" at 1370.297,1422.931 h0.64; PIN_NUMBER "1" at 1362.377,1422.931 h0.64; PIN_NUMBER "2" at 1366.337,1422.931 h0.64
U12: PIN_NUMBER "3" at 1400.497,1422.931 h0.64; PIN_NUMBER "1" at 1392.577,1422.931 h0.64; PIN_NUMBER "2" at 1396.537,1422.931 h0.64
U40: PIN_NUMBER "1" at 1379.993,1434.437 h0.15 r270; PIN_NUMBER "3" at 1379.993,1431.897 h0.15 r270; PIN_NUMBER "6" at 1385.393,1431.897 h0.15 r270; PIN_NUMBER "4" at 1379.993,1430.627 h0.15 r270; PIN_NUMBER "8" at 1385.393,1434.437 h0.15 r270; PIN_NUMBER "5" at 1385.393,1430.627 h0.15 r270; PIN_NUMBER "2" at 1379.993,1433.167 h0.15 r270; PIN_NUMBER "7" at 1385.393,1433.167 h0.15 r270; PIN_NUMBER "9" at 1382.693,1432.532 h0.15 r270; Top Overlay "TPS54360BDDAR" at 1382.953,1433.632 h0.45 r270
U41: PIN_NUMBER "1" at 1398.772,1437.756 h0.64 r180; PIN_NUMBER "4" at 1398.747,1433.514 h0.64 r180; PIN_NUMBER "5" at 1402.195,1432.204 h0.64 r180; PIN_NUMBER "6" at 1402.195,1438.364 h0.64 r180; PIN_NUMBER "7" at 1407.795,1435.284 h0.64 r180; PIN_NUMBER "2" at 1398.747,1436.232 h0.64 r180; PIN_NUMBER "3" at 1398.747,1434.86 h0.64 r180